# EAGLE board LaserTagSMT (EAGLE 6.2)
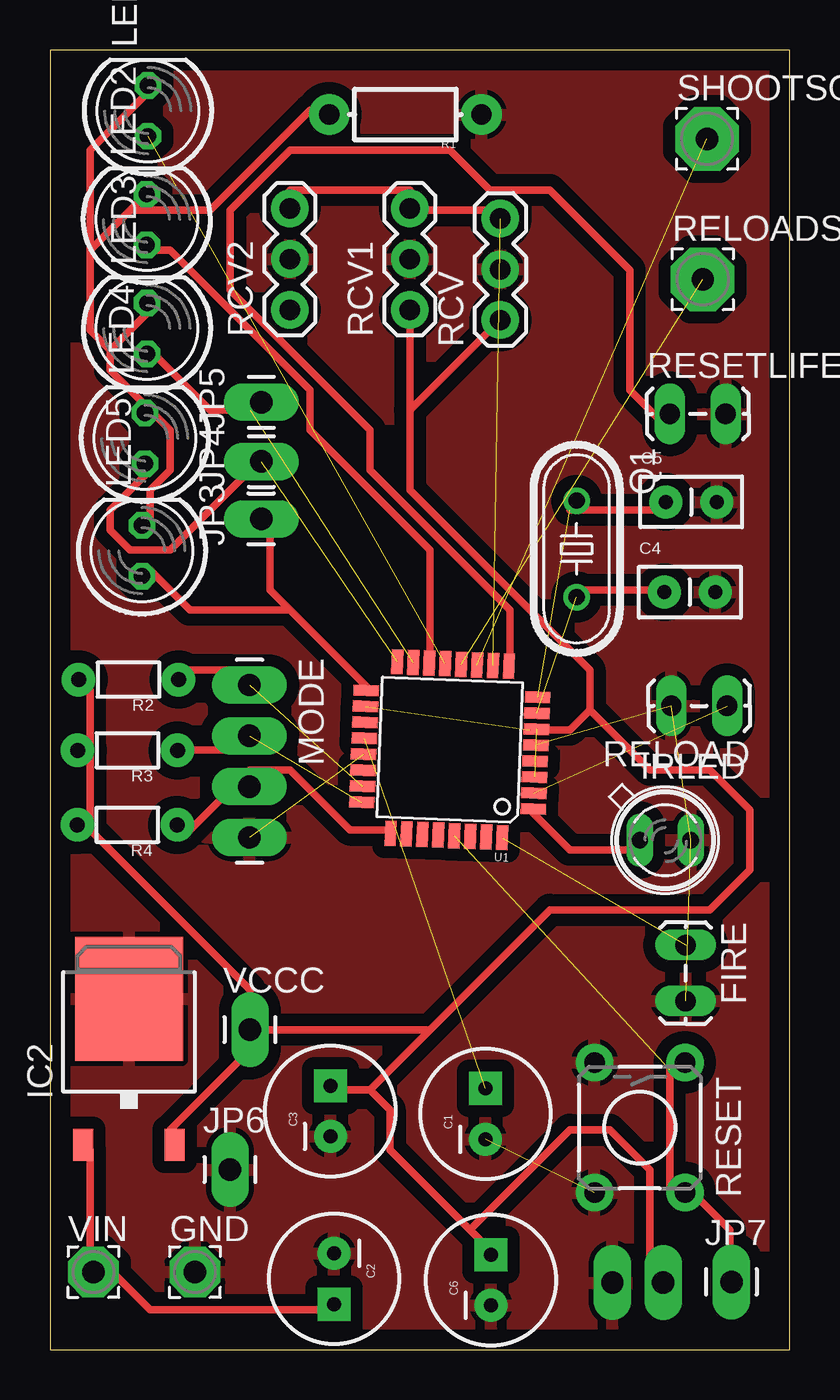
[diagram p0: board, top side]

Size 37 x 65 mm. Coordinates in mm from the lower left corner, seen from the top.
Outline: 0,0 37,0 37,65 0,65 0,0
Copper layers (1*16): Top 0.035mm / dielectric 1.5mm / Bottom 0.035mm
Design rules: minimum track width 10mil, minimum drill 24mil, track to track 8mil, track to pad 8mil, pad to pad 8mil, via to via 8mil, smd to smd 8mil, copper to edge 40mil, drill to drill 8mil, minimum pad ring 10mil, minimum via ring 8mil, stop-mask expansion 4mil, vias tented up to drill 0mil, thermal gap 10mil
Net classes: 0 default: width 0.381 mm, drill 0.203 mm, clearance 0.254 mm

## Footprints (pad centres in the part's own frame; a part is rotated, then mirrored left to right if it is on the bottom)
CPOL-RADIAL-100UF-25V = drill 0.7 pad 1.651 square: 1 1.27,0 | drill 0.7 pad 1.651: 2 -1.27,0
CAP-PTH-SMALLEZ = drill 0.7 pad 1.651: 1 0,0; 2 2.54,0
1X02_LOCK_LONGPADS = drill 1.016 long: 1 -0.127,0; 2 2.667,0
2,54/1,1 = drill 1.118 pad 2.54 octagon: 1 0,0
TO252 = smd 1 x 1.6: 1 -2.28,-4.8; 2 2.28,-4.8 | smd 5.4 x 6.2: 3 0,2.5
SFH482 = drill 0.813 long: A -1.27,0; K 1.27,0
1X01_LONGPAD = drill 1.118 pad 1.88 long: 1 0,0
LED5MM = drill 0.813 octagon: A -1.27,0; K 1.27,0
1X04_LONGPADS = drill 1.118 pad 1.88 long: 1 0,0; 2 2.54,0; 3 5.08,0; 4 7.62,0
HC49/S = drill 0.813: 1 -2.413,0; 2 2.413,0
AXIAL-0.3-KIT = drill 1.016 pad 2.032: P$1 -3.81,0; P$2 3.81,0
1/6W-RES = drill 0.762 pad 1.676: 1 -2.5,0; 2 2.5,0
1X03 = drill 1.016 pad 1.88: 1 0,0; 2 2.54,0; 3 5.08,0
3,17/1,1 = drill 1.118 pad 3.175 octagon: 1 0,0
TACTILE-PTH = drill 1.016 pad 1.88: 1 -3.251,2.261; 2 3.251,2.261; 3 -3.251,-2.261; 4 3.251,-2.261
TQFP32-08 = smd 1.27 x 0.559: 1 -4.293,2.8; 2 -4.293,2; 3 -4.293,1.2; 4 -4.293,0.4; 5 -4.293,-0.4; 6 -4.293,-1.2; 7 -4.293,-2; 8 -4.293,-2.8; 17 4.293,-2.8; 18 4.293,-2; 19 4.293,-1.2; 20 4.293,-0.4; 21 4.293,0.4; 22 4.293,1.2; 23 4.293,2; 24 4.293,2.8 | smd 0.559 x 1.27: 9 -2.8,-4.293; 10 -2,-4.293; 11 -1.2,-4.293; 12 -0.4,-4.293; 13 0.4,-4.293; 14 1.2,-4.293; 15 2,-4.293; 16 2.8,-4.293; 25 2.8,4.293; 26 2,4.293; 27 1.2,4.293; 28 0.4,4.293; 29 -0.4,4.293; 30 -1.2,4.293; 31 -2,4.293; 32 -2.8,4.293
1X02_LONGPADS = drill 1.118 pad 1.88 long: 1 0,0; 2 2.54,0

## Placement (x,y rotation side)
C1  [CPOL-RADIAL-100UF-25V]  21.79,11.79 90 top
C2  [CPOL-RADIAL-100UF-25V]  14.21,3.54 270 top
C3  [CPOL-RADIAL-100UF-25V]  14.03,11.93 90 top
C4  [CAP-PTH-SMALLEZ]  30.74,37.88 0 top
C5  [CAP-PTH-SMALLEZ]  30.81,42.4 0 top
C6  [CPOL-RADIAL-100UF-25V]  22.07,3.48 90 top
FIRE  [1X02_LOCK_LONGPADS]  31.8,20.1 270 top
GND  GND PAD  [2,54/1,1]  7.25,3.88 0 top
IC2  7805DT  [TO252]  3.95,15.05 0 top
IRLED  SFH482  [SFH482]  30.78,25.48 0 top
JP3  13  [1X01_LONGPAD]  10.57,41.55 90 top
JP4  12  [1X01_LONGPAD]  10.57,44.42 90 top
JP5  11  [1X01_LONGPAD]  10.57,47.38 90 top
JP6  M01PTH_LONGPAD  [1X01_LONGPAD]  9,9 0 top
JP7  M01PTH_LONGPAD  [1X01_LONGPAD]  34.09,3.38 0 top
LED1  [LED5MM]  4.9,61.96 90 top
LED2  [LED5MM]  4.84,56.52 90 top
LED3  [LED5MM]  4.86,51.07 90 top
LED4  [LED5MM]  4.75,45.58 90 top
LED5  [LED5MM]  4.6,39.95 90 top
MODE  [1X04_LONGPADS]  9.98,33.23 270 top
Q1  [HC49/S]  26.35,40.05 270 top
R1  [AXIAL-0.3-KIT]  17.78,61.77 180 top
R2  [1/6W-RES]  3.93,33.51 180 top
R3  [1/6W-RES]  3.88,29.97 180 top
R4  [1/6W-RES]  3.87,26.24 180 top
RCV  IR RCVR  [1X03]  22.53,51.49 90 top
RCV1  IR RCVR  [1X03]  18,52 90 top
RCV2  IR RCVR  [1X03]  12,52 90 top
RELOAD  [1X02_LOCK_LONGPADS]  33.75,32.2 180 top
RELOADSOUND  RELOAD  [3,17/1,1]  32.66,53.53 0 top
RESET  [TACTILE-PTH]  29.51,11.1 270 top
RESETLIFE  [1X02_LOCK_LONGPADS]  31.14,46.8 0 top
SHOOTSOUND  SHOOT  [3,17/1,1]  32.87,60.56 0 top
U1  ATMEGA168  [TQFP32-08]  20,30 177.7 top
VCCC  5  [1X01_LONGPAD]  10,16 0 top
VIN  Vin PAD  [2,54/1,1]  2.17,3.88 0 top
VOUT  [1X02_LONGPADS]  30.68,3.34 180 top

## Library data of the parts
C1-C6 = SparkFun-Capacitors
FIRE JP3-JP7 MODE RCV RCV1 RCV2 RELOAD RESETLIFE VCCC VOUT = SparkFun-Connectors
GND RELOADSOUND SHOOTSOUND VIN = wirepad
IC2 = linear
IRLED LED1-LED5 = led
Q1 = crystal; OC_FARNELL: 1667008; OC_NEWARK: unknown
R1-R4 = SparkFun-Resistors
RESET = SparkFun-Electromechanical
U1 = SparkFun

## Nets
CONNECT: FIRE.1 U1.32
GND: C1.2 C2.2 C3.2 C4.2 C5.2 C6.2 FIRE.2 GND.1 IC2.3 IRLED.K JP6.1 MODE.4 R1.P$1 RCV1.2 RCV2.2 RCV.2 RELOAD.2 RESET.3 RESET.4 RESETLIFE.2 U1.3 U1.5 U1.21 VOUT.2
IR_RCV: RCV1.3 RCV2.3 RCV.3 U1.10
N$1: C2.1 IC2.1 VIN.1
N$2: C1.1 U1.20
N$3: LED1.A U1.13
N$4: C5.1 Q1.1 U1.8
N$5: LED2.A U1.14
N$6: C4.1 Q1.2 U1.7
N$7: JP5.1 LED3.A U1.15
N$8: JP4.1 LED4.A U1.16
N$9: JP3.1 LED5.A U1.17
N$10: LED1.K LED2.K LED3.K LED4.K LED5.K R1.P$2
N$11: IRLED.A U1.1
N$13: RELOAD.1 U1.2
N$14: RESETLIFE.1 U1.9
N$17: MODE.1 R2.1 U1.23
N$18: MODE.2 R3.1 U1.24
N$19: MODE.3 R4.1 U1.25
RELOADSOUND: RELOADSOUND.1 U1.12
RESETWIRE: JP7.1 RESET.1 RESET.2 U1.29
SHOOTSOUND: SHOOTSOUND.1 U1.11
VCC: C3.1 C6.1 IC2.2 R2.2 R3.2 R4.2 RCV1.1 RCV.1 U1.4 U1.6 U1.18 VCCC.1 VOUT.1

## Tracks (layer width: path | path; a pad name or v marks a point on that pad's centre or on a via)
CONNECT  (1 unrouted)
GND  (6 unrouted)
  pour Top (isolate 0.61): 0,65 37,65 37,0 0,0
IR_RCV  (1 unrouted)
  Top 0.381: RCV2.3 12,58 18,58 RCV1.3 18,57 22,57 RCV.3
N$1
  Top 0.381: IC2.1 2,10 2,4 VIN.1 3,4 5,2 14,2 C2.1
N$2  (1 unrouted)
N$3  (1 unrouted)
N$4  (1 unrouted)
  Top 0.381: Q1.1 26,42 31,42 C5.1
N$5
  Top 0.381: U1.14 19,34 19,40 13,46 13,48 6,55 5,55 LED2.A
N$6  (1 unrouted)
  Top 0.381: Q1.2 26,38 30,38 C4.1
N$7  (1 unrouted)
  Top 0.381: LED3.A 5,50 8,47 10,47 JP5.1
N$8  (1 unrouted)
  Top 0.381: LED4.A 5,44 3,42 3,41 4,40 6,40 10,44 JP4.1
N$9
  Top 0.381: 12,37 11,38 11,41 JP3.1 | 12,37 16,33 U1.17 | 12,37 7,37 5,39 LED5.A
N$10
  Top 0.381: 5,47 6,46 6,44 5,43 5,41 LED5.K | 3,50 5,52 LED3.K | 3,50 3,49 5,47 | 5,47 LED4.K | 2,55 4,57 | 4,57 5,58 LED2.K | 2,55 2,51 3,50 | 2,55 2,60 5,63 LED1.K | 4,57 8,57 13,62 R1.P$2
N$11
  Top 0.381: U1.1 24,27 26,25 29,25 IRLED.A
N$13  (1 unrouted)
N$14
  Top 0.381: U1.9 23,34 23,37 16,44 16,46 9,53 9,57 12,60 20,60 22,58 25,58 29,54 29,48 31,46 RESETLIFE.1
N$17  (1 unrouted)
  Top 0.381: R2.1 7,34 9,34 MODE.1
N$18  (1 unrouted)
  Top 0.381: R3.1 7,30 9,30 MODE.2
N$19
  Top 0.381: U1.25 17,26 15,26 12,29 10,29 MODE.3 9,28 7,26 R4.1
RELOADSOUND  (1 unrouted)
RESETWIRE  (1 unrouted)
  Top 0.381: JP7.1 34,4 34,6 32,8 RESET.2 31,8 31,14 RESET.1
SHOOTSOUND  (1 unrouted)
VCC  (2 unrouted)
  Top 0.381: 2,30 2,26 | 2,30 2,33 R2.2 | 2,30 R3.2 | VCCC.1 10,15 6,11 IC2.2 | 2,26 10,18 VCCC.1 | 2,26 R4.2 | 27,32 26,31 24,31 U1.6 | 27,32 27,34 18,43 18,47 | RCV1.1 18,47 | 18,47 22,51 RCV.1 | 21,6 17,10 17,12 16,13 | 21,6 22,5 C6.1 | 16,13 14,13 C3.1 | 21,6 26,11 28,11 30,9 30,4 VOUT.1 | 27,32 30,29 33,29 35,27 35,24 33,22 25,22 19,16 | 16,13 19,16 | 19,16 VCCC.1